# Altium PCB lcd_ex_cap_touch.PcbDoc
Units mil, origin at the board's own origin, x right, y up, seen from the top; angles counter-clockwise.
Board outline 1045 x 2855 mil, 2 copper layers (Top Layer, Bottom Layer); 3 components, 37 nets, 94 pads, 18 vias.
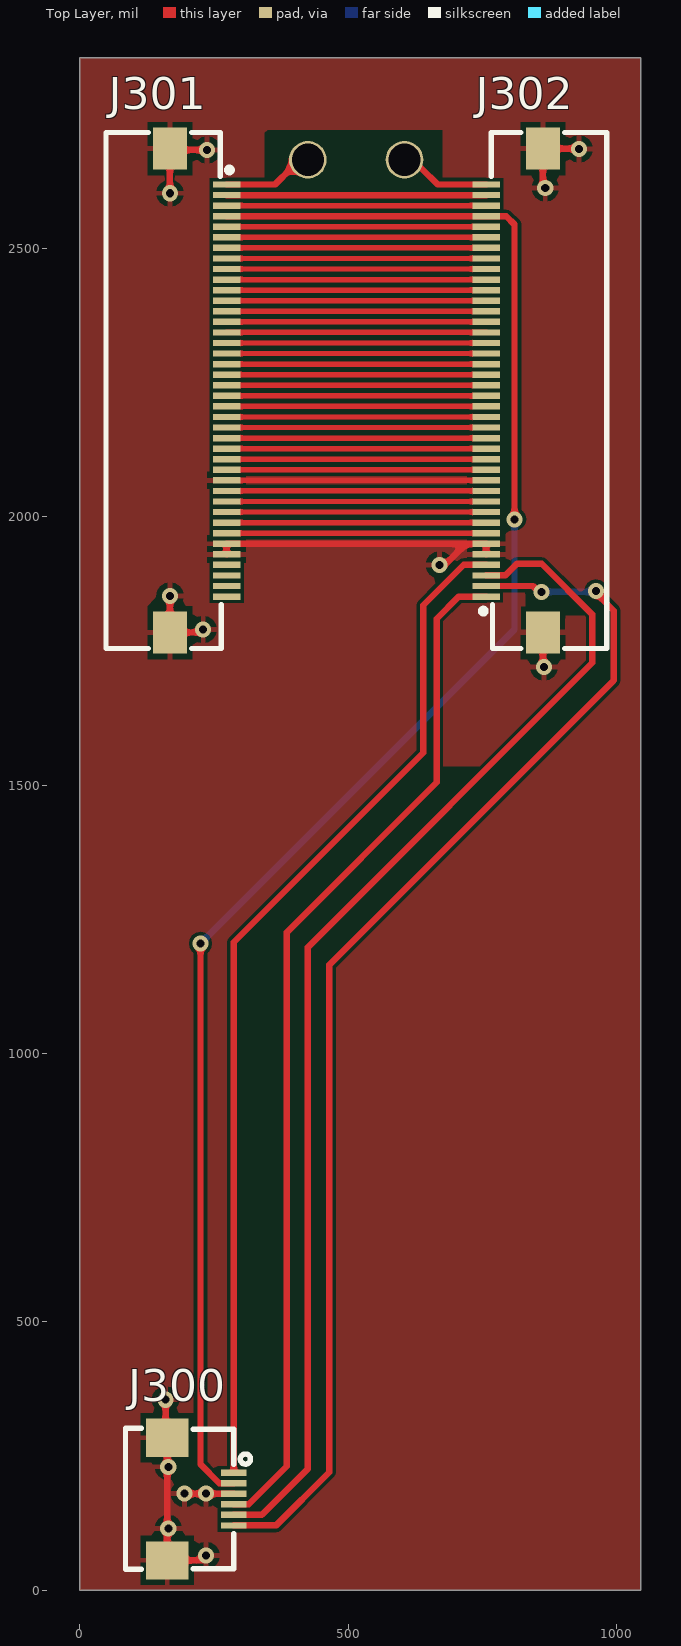
[diagram p0: Top Layer view]
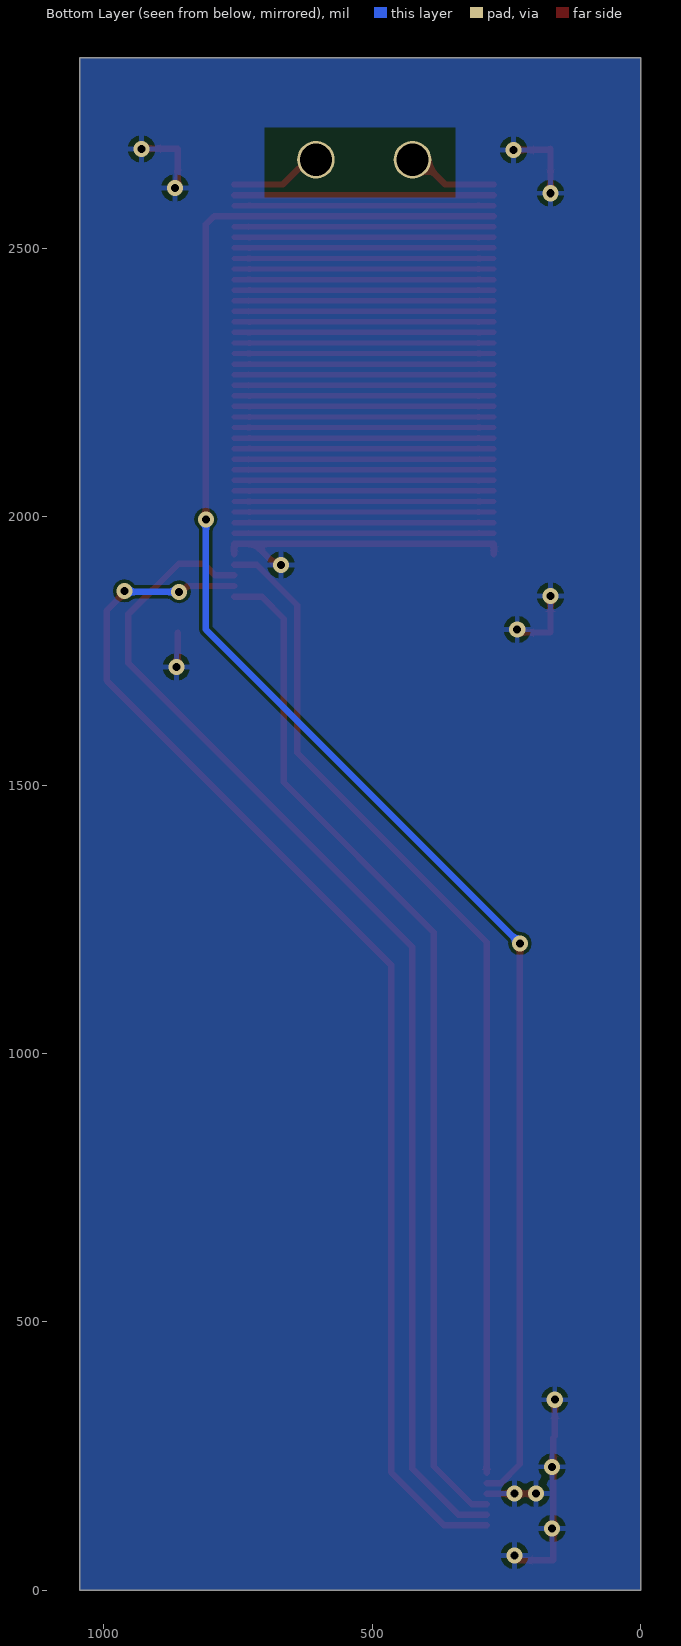
[diagram p1: Bottom Layer view, seen from below]

## Layer stack, top to bottom
Top Solder: solder mask 0.4, Solder Resist, Dk 3.5
Top Layer: signal copper 1.4
Dielectric 1: dielectric 12.6, FR-4, Dk 4.8
Bottom Layer: signal copper 1.4
Bottom Solder: solder mask 0.4, Solder Resist, Dk 3.5

## Board outline
0,0 1045,0 1045,1660 1045,1685 1045,2855 0,2855

## Design rules (kind name [scope] priority, off if disabled: settings)
Clearance [All] p1: gap=6 ignorepadtopadclearanceinfootprint=FALSE
PolygonConnect [All] p1: connectstyle=Relief reliefconductorwidth=10 reliefentries=4 polygonreliefangle="90 Angle" airgapwidth=10
RoutingVias [All] p1: holewidth=28 width=50 viastyle="Through Hole" minholewidth=28 minwidth=50 maxholewidth=28 maxwidth=50
SolderMaskExpansion [All] p1: expansion=4 istentingtop=FALSE
Width [All] p1: maxlimit=15 minlimit=10 preferedwidth=10
30 further rules are at their usual default settings.

## Components (designator, comment, footprint, x,y, rotation, side; value= is the part's Value field where it differs from the comment)
J300 "AFC24-S06FIA-00" FPC-SMD_P0.50-6P_QCHF-SM-H2.0_1 225,170 r90 top
J301 "AFC01-S40FCA-00" FPC-SMD_AFC01-S40FCA-00 220.76,2235 r270 top
J302 "AFC01-S40FCA-00" FPC-SMD_AFC01-S40FCA-00 810,2235 r90 top

## Footprints (in the part's own frame and the unit in brackets; to place one, negate y for a bottom-side part, rotate by r counter-clockwise, add the part's x,y. Pads: shape width x height; smd on the part's side, far side on the other; paste and mask are expansions set on the pad)
FPC-SMD_AFC01-S40FCA-00 [mm]
  rect 0.3x1.3 smd: 1(-9.75,1.34) 2(-9.25,1.338) 3(-8.75,1.34) 4(-8.25,1.34) 5(-7.75,1.34) 6(-7.25,1.34) 7(-6.75,1.34) 8(-6.25,1.34) 9(-5.75,1.34) 10(-5.25,1.34) 11(-4.75,1.34) 12(-4.25,1.34) 13(-3.75,1.34) 14(-3.25,1.34) 15(-2.75,1.34) 16(-2.25,1.34) 17(-1.75,1.34) 18(-1.25,1.34) 19(-0.75,1.34) 20(-0.25,1.34) 21(0.25,1.34) 22(0.75,1.34) 23(1.25,1.34) 24(1.75,1.34) 25(2.25,1.34) 26(2.75,1.34) 27(3.25,1.34) 28(3.75,1.34) 29(4.25,1.34) 30(4.75,1.34) 31(5.25,1.34) 32(5.75,1.34) 33(6.25,1.34) 34(6.75,1.34) 35(7.25,1.34) 36(7.75,1.34) 37(8.25,1.34) 38(8.75,1.34) 39(9.25,1.34) 40(9.75,1.34)
  rect 2x1.6 smd: 41(-11.45,-1.34) 42(11.45,-1.34)
  silkscreen extent -12.21,-4.36 12.21,1.61
FPC-SMD_P0.50-6P_QCHF-SM-H2.0_1 [mm]
  rect 0.3x1.2 smd paste+0.051 mask+0: 1(1.25,-1.573) 2(0.75,-1.575) 3(0.25,-1.575) 4(-0.25,-1.575) 5(-0.75,-1.575) 6(-1.25,-1.575)
  rect 1.8x2 smd paste+0.051 mask+0: 7(2.9,1.575) 8(-2.9,1.575)
  silkscreen extent -3.32,-2.36 3.35,3.55

## Part data
J301 J302: "FPC", JLCPCB Part Class="Extended Part", LCSC Part Name="间距:0.5mm P数:40P 翻盖式 下接", Manufacturer=JS(钜硕电子), Add into BOM=yes, Contact Type=下接, Convert to PCB=yes, Datasheet=https://item.szlcsc.com/datasheet/AFC01-S40FCA-00/253933.html, Device=AFC01-S40FCA-00, FFC, FCB Thickness=0.3mm, Height Above Board=2mm, Locking Feature=翻盖式, Manufacturer Part=AFC01-S40FCA-00, Mounting Type=卧贴, Number of Contacts=40P, Pitch=0.5mm, Supplier=LCSC, Supplier Footprint=SMD,P=0.5mm,卧贴, Supplier Part=C262674, Symbol=AFC01-S40FCA-00
J300: Symbol=AFC24-S06FIA-00

## Free pads (board coordinates)
  round 70 hole 60: 2(425,2665) 2(605,2665)

## Via types
v1: diameter 30, hole 15, Top Layer to Bottom Layer, tented both sides, 18 vias

## Nets (pads, with @x,y where several pads share a name; then routed paths per layer and width w, separated by ;. In a path a pad name is that pad's centre, name@x,y a point inside that pad or via, vN(x,y) a via of type N, cw(c..) or ccw(c..) an arc to the next point about the centre after c; other vN are vias at no path point)
GND: J300.3 J300.7 J300.8 J301.29 J301.35 J301.36 J301.41 J301.42 J302.5 J302.6 J302.12 J302.41 J302.42 | length 2038.9
  Top Layer w10: J301.29 J302.12
  Top Layer w12: v1(160,355) 160,287.16 J300.7 J300.8 225.83,55.83 v1(235,65) ; v1@165,1855 v1(168,1852) J301.42 224.21,1784.22 v1(230,1790) ; v1(168,2602.57) J301.41 170.56,2683.23 v1(237.18,2683.23) ; v1(195,180) 195.16,179.84 J300.3 ; J301.36 J301.35 719.56,1949.57 ; v1(670,1910) 680,1910 719.56,1949.57 ; J302.5 J302.6 719.56,1949.57 ; J302.41 862.75,1722.24 v1(865,1720) ; v1(867.26,2612.39) 862.75,2616.9 J302.42 929.21,2685.78 v1(930,2685)
  other v1: 165,115 235,180 165,230
INT: J300.4 J302.1 | length 1931.9
  Top Layer w12: J300.4 287.1,160.25 314.84,160.25 385.54,230.95 385.54,1225.54 665,1505 665,1810 706.14,1851.14 J302.1
LCD_RST: J300.1 J302.4 | length 1910.4
  Top Layer w12: J300.1 286.94,1206.95 640,1560 640,1835 715.19,1910.2 J302.4
NetJ301_2: J301.2 J302.39 | length 483.8
  Top Layer w12: J301.2 J302.39
NetJ301_3: J301.3 J302.38 | length 483.7
  Top Layer w10: J301.3 J302.38
NetJ301_5: J301.5 J302.36 | length 483.7
  Top Layer w10: J301.5 J302.36
NetJ301_6: J301.6 J302.35 | length 483.7
  Top Layer w10: J301.6 J302.35
NetJ301_7: J301.7 J302.34 | length 483.7
  Top Layer w10: J301.7 J302.34
NetJ301_8: J301.8 J302.33 | length 483.7
  Top Layer w10: J301.8 J302.33
NetJ301_9: J301.9 J302.32 | length 483.7
  Top Layer w10: J301.9 J302.32
NetJ301_10: J301.10 J302.31 | length 483.7
  Top Layer w10: J301.10 J302.31
NetJ301_11: J301.11 J302.30 | length 483.7
  Top Layer w10: J301.11 J302.30
NetJ301_12: J301.12 J302.29 | length 483.7
  Top Layer w10: J301.12 J302.29
NetJ301_13: J301.13 J302.28 | length 483.7
  Top Layer w10: J301.13 J302.28
NetJ301_14: J301.14 J302.27 | length 483.7
  Top Layer w10: J301.14 J302.27
NetJ301_15: J301.15 J302.26 | length 483.7
  Top Layer w10: J301.15 J302.26
NetJ301_16: J301.16 J302.25 | length 483.7
  Top Layer w10: J301.16 J302.25
NetJ301_17: J301.17 J302.24 | length 483.7
  Top Layer w10: J301.17 J302.24
NetJ301_18: J301.18 J302.23 | length 483.7
  Top Layer w10: J301.18 J302.23
NetJ301_19: J301.19 J302.22 | length 483.7
  Top Layer w10: J301.19 J302.22
NetJ301_20: J301.20 J302.21 | length 483.7
  Top Layer w10: J301.20 J302.21
NetJ301_21: J301.21 J302.20 | length 483.7
  Top Layer w10: J301.21 J302.20
NetJ301_22: J301.22 J302.19 | length 483.7
  Top Layer w10: J301.22 J302.19
NetJ301_23: J301.23 J302.18 | length 483.7
  Top Layer w10: J301.23 J302.18
NetJ301_24: J301.24 J302.17 | length 483.7
  Top Layer w10: J301.24 J302.17
NetJ301_25: J301.25 J302.16 | length 483.7
  Top Layer w10: J301.25 J302.16
NetJ301_26: J301.26 J302.15 | length 483.7
  Top Layer w10: J301.26 J302.15
NetJ301_27: J301.27 J302.14 | length 483.7
  Top Layer w10: J301.27 J302.14
NetJ301_28: J301.28 J302.13 | length 483.7
  Top Layer w10: J301.28 J302.13
NetJ301_30: J301.30 J302.11 | length 483.7
  Top Layer w10: J301.30 J302.11
NetJ301_31: J301.31 J302.10 | length 483.7
  Top Layer w10: J301.31 J302.10
NetJ301_32: J301.32 J302.9 | length 483.7
  Top Layer w10: J301.32 J302.9
NetJ301_33: J301.33 J302.8 | length 483.7
  Top Layer w10: J301.33 J302.8
NetJ301_34: J301.34 J302.7 | length 483.7
  Top Layer w10: J301.34 J302.7
SCL: J300.6 J302.2 | length 2303.4
  Top Layer w12: J300.6 365.71,120.79 465,220.08 465,1165 995,1695 995,1825 961.59,1858.41 v1(961.59,1861.59) ; J302.2 844.3,1870.82 855.13,1860 v1(860,1860)
  Bottom Layer w12: v1(860,1860) 960,1860 v1(961.59,1861.59)
SDA: J300.5 J302.3 | length 2230.9
  Top Layer w12: J300.5 287.1,140.56 339.46,140.56 425.19,226.29 425.19,1197.97 955,1727.78 955,1817.95 860.46,1912.49 814.57,1912.49 792.7,1890.61 757.34,1890.61 J302.3
VCCP: J300.2 J301.4 J302.37 | length 3171.5
  Top Layer w12: v1(225,1205) 225,234.66 260.03,199.62 286.91,199.62 J300.2 ; J301.4 J302.37 757.34,2559.71 794.71,2559.71 810,2544.42 v1(810,1995)
  Bottom Layer w12: v1(225,1205) 810,1790 v1(810,1995)
pads on no net: J301.1 J301.37 J301.38 J301.39 J301.40 J302.40
copper on no net: | length 289.6
  Top Layer w12: 273.51,2618.85 363.85,2618.85 394.33,2649.33 417.05,2649.33 ; 636.42,2649.3 666.87,2618.85 757.24,2618.85

## Polygon pours and split planes (outlines as drawn)
GND on Top Layer "NONET_L04_P-001" (solid, remove dead copper, pour order 0): 0,2855 1045,2855 1045,0 0,0
GND on Bottom Layer "NONET_L04_P-001" (solid, remove dead copper, pour order 1): 0,2855 1045,2855 1045,0 0,0

## Other copper
Top Layer:
  pour cut-out: 480,2720 545,2720 545,2611.41 543.59,2610 480,2610
  pour cut-out: 545,2720 675,2720 675,2615 660,2615 655,2610 545,2610
  pour cut-out: 480,2720 480,2610 388.19,2610 386.78,2611.41 385.37,2610 345,2610 345,2715 350,2720
  pour cut-out: 144.19,1843.59 144.19,1839.56 138.21,1833.59 126.51,1833.59 139.92,1847 143.51,1847
  pour cut-out: 904.25,1838.33 908.08,1842.16 913.49,1842.16 940.65,1815 905,1815
  pour cut-out: 881.39,1860.12 873.23,1851.96 873.23,1836.62 876.27,1833.59 904.25,1833.59 904.25,1851.4 890.6,1865.05
  pour cut-out: 838.87,1858.59 838.87,1851.48 846.77,1843.59 846.77,1836.62 840.15,1830 830,1830 830,1855
  pour cut-out: 397.77,1220.47 397.77,1225.54 677.23,1505 675,1507.24 675,1535 745,1535 414.36,1204.36 413.88,1204.36
  pour cut-out: 397.77,1220.47 413.88,1204.36 413.88,234.52 399.36,220 395,220 395,250 397.77,252.77
Bottom Layer:
  pour cut-out: 345,2725 700,2725 700,2595 345,2595

## Silkscreen, mask and mechanical layers (free items; w line width, h text height)
Mechanical 1:
  lines w10: 0,0 0,2855 1045,2855 1045,1685 1045,1660 1045,0 65,0 0,0